# Altium PCB Node_Water.PcbDoc
Units mil, origin at the board's own origin, x right, y up, seen from the top; angles counter-clockwise.
Board outline 5635 x 3755 mil, 2 copper layers (Top Layer, Bottom Layer); 19 components, 13 nets, 136 pads, 0 vias.
Unrouted connection lines stored in the file: 1.
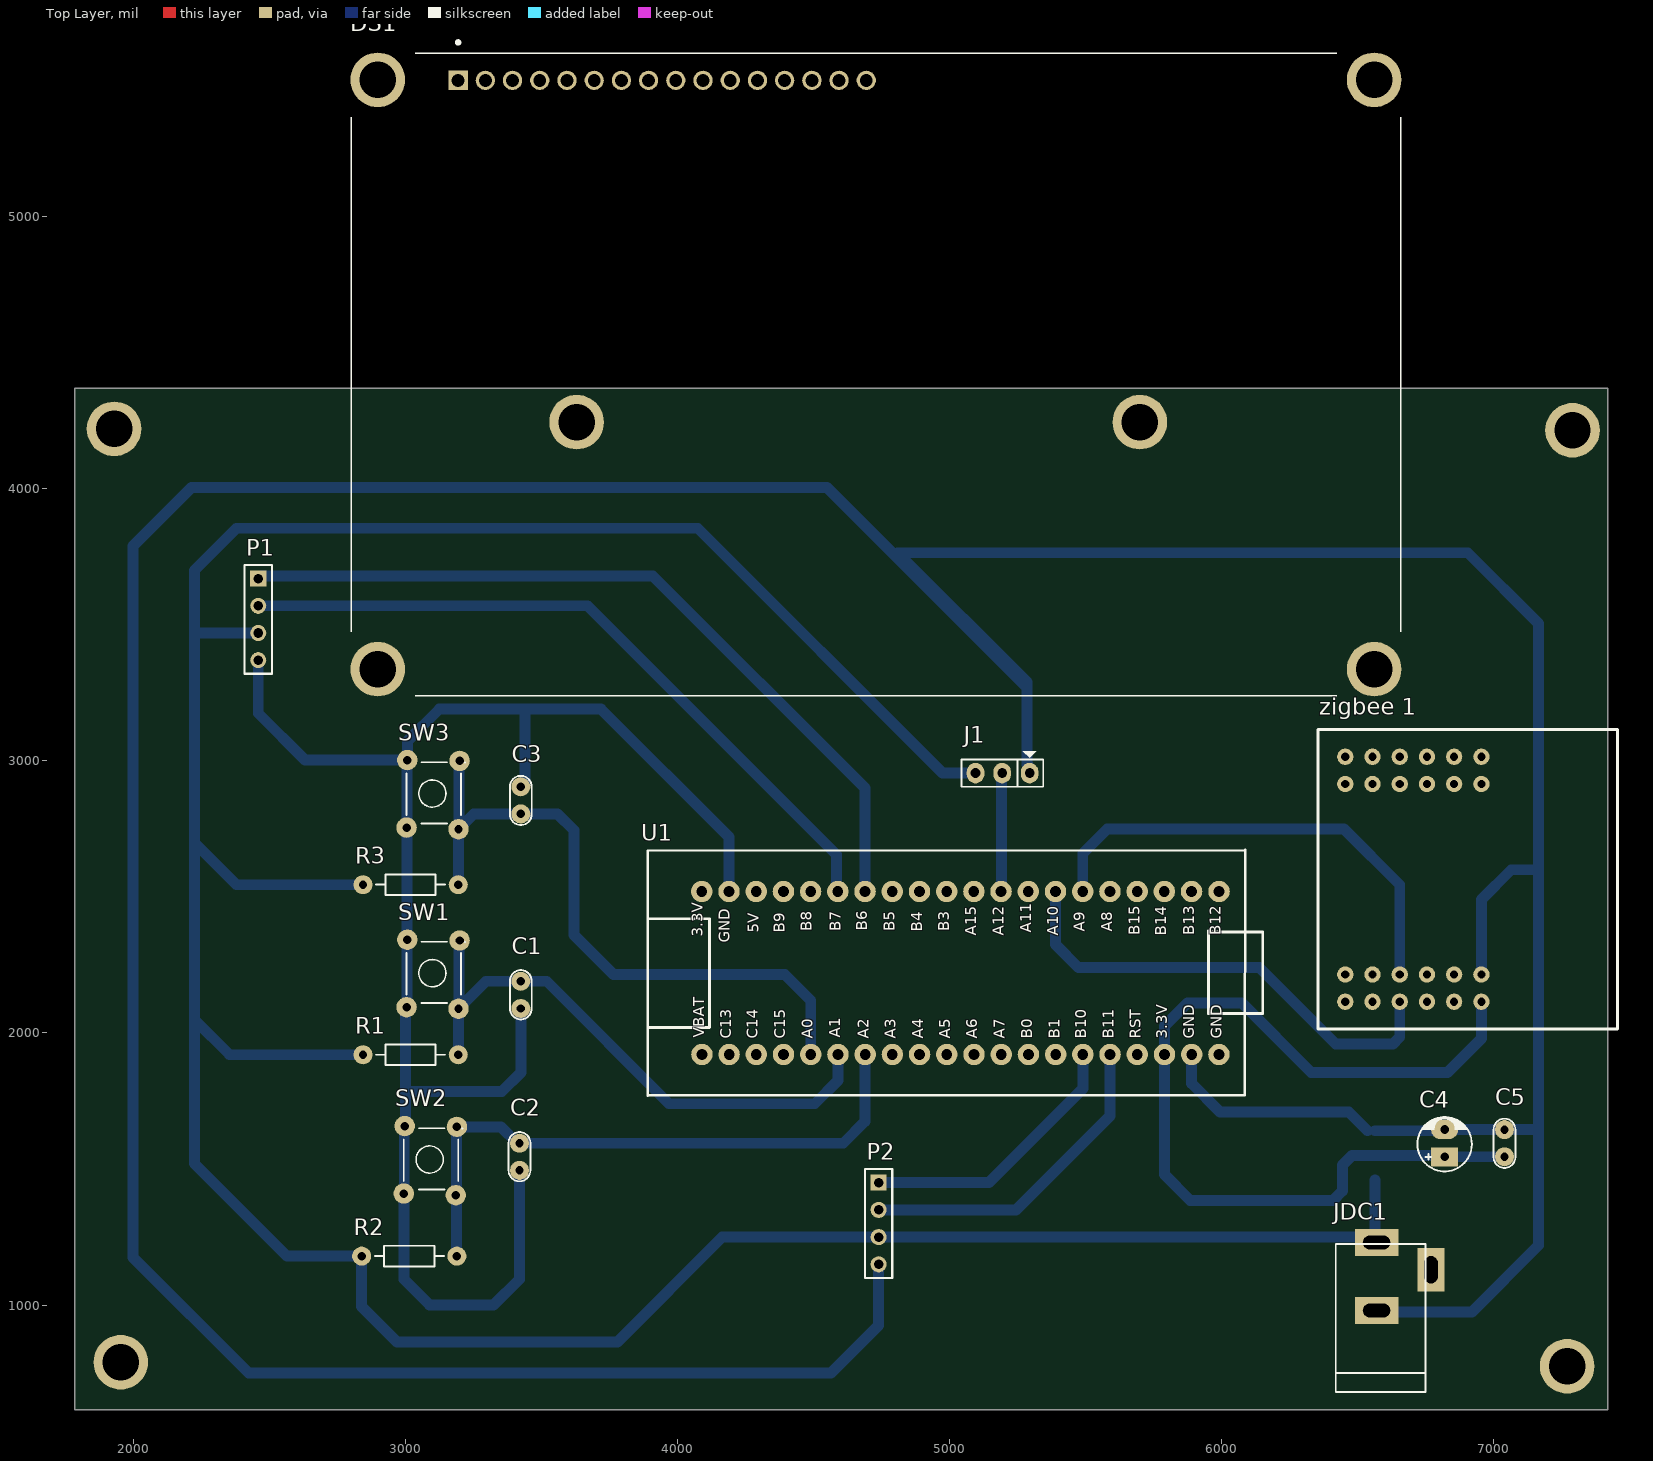
[diagram p0: Top Layer view]
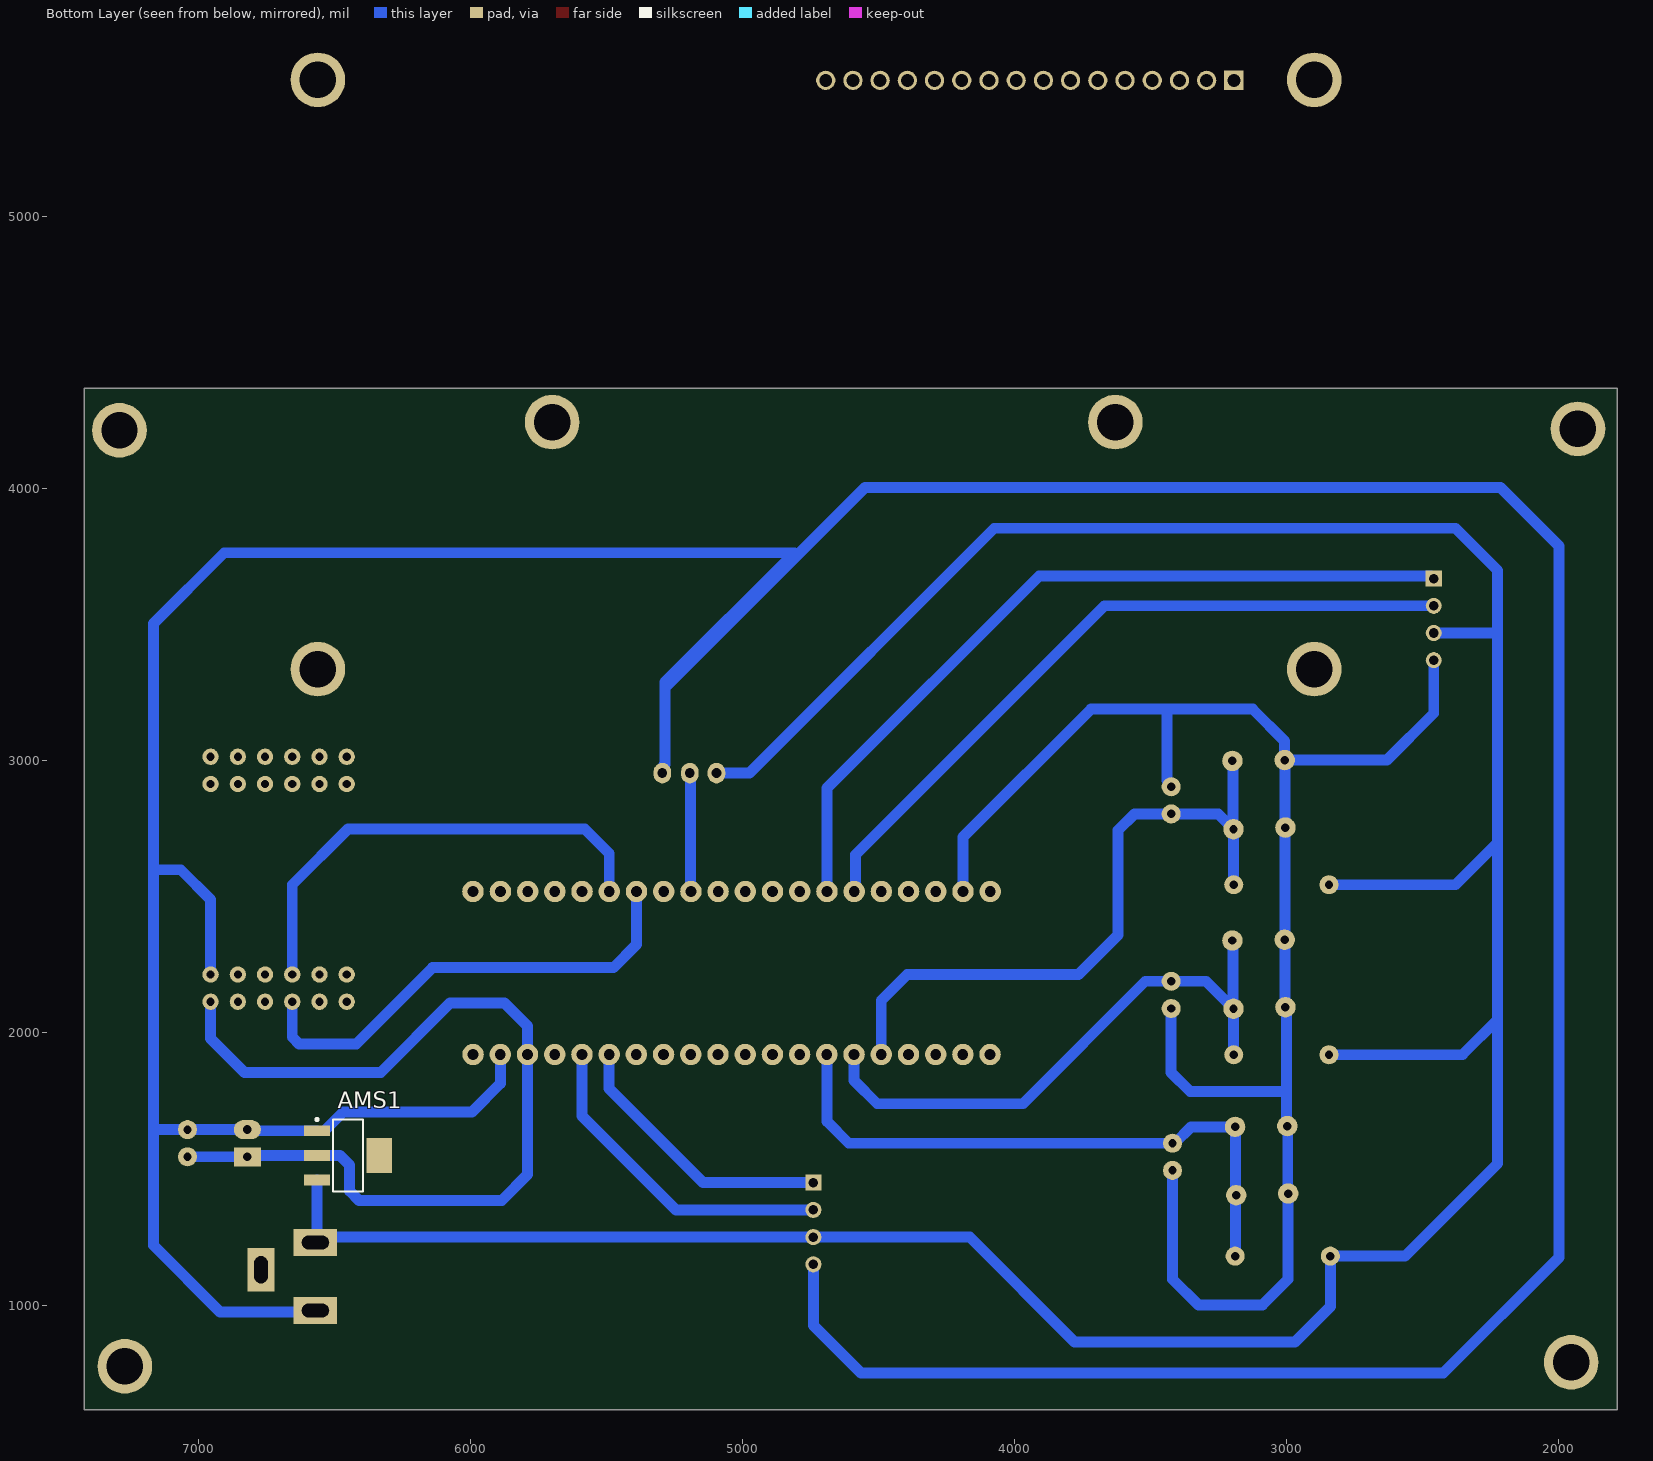
[diagram p1: Bottom Layer view, seen from below]
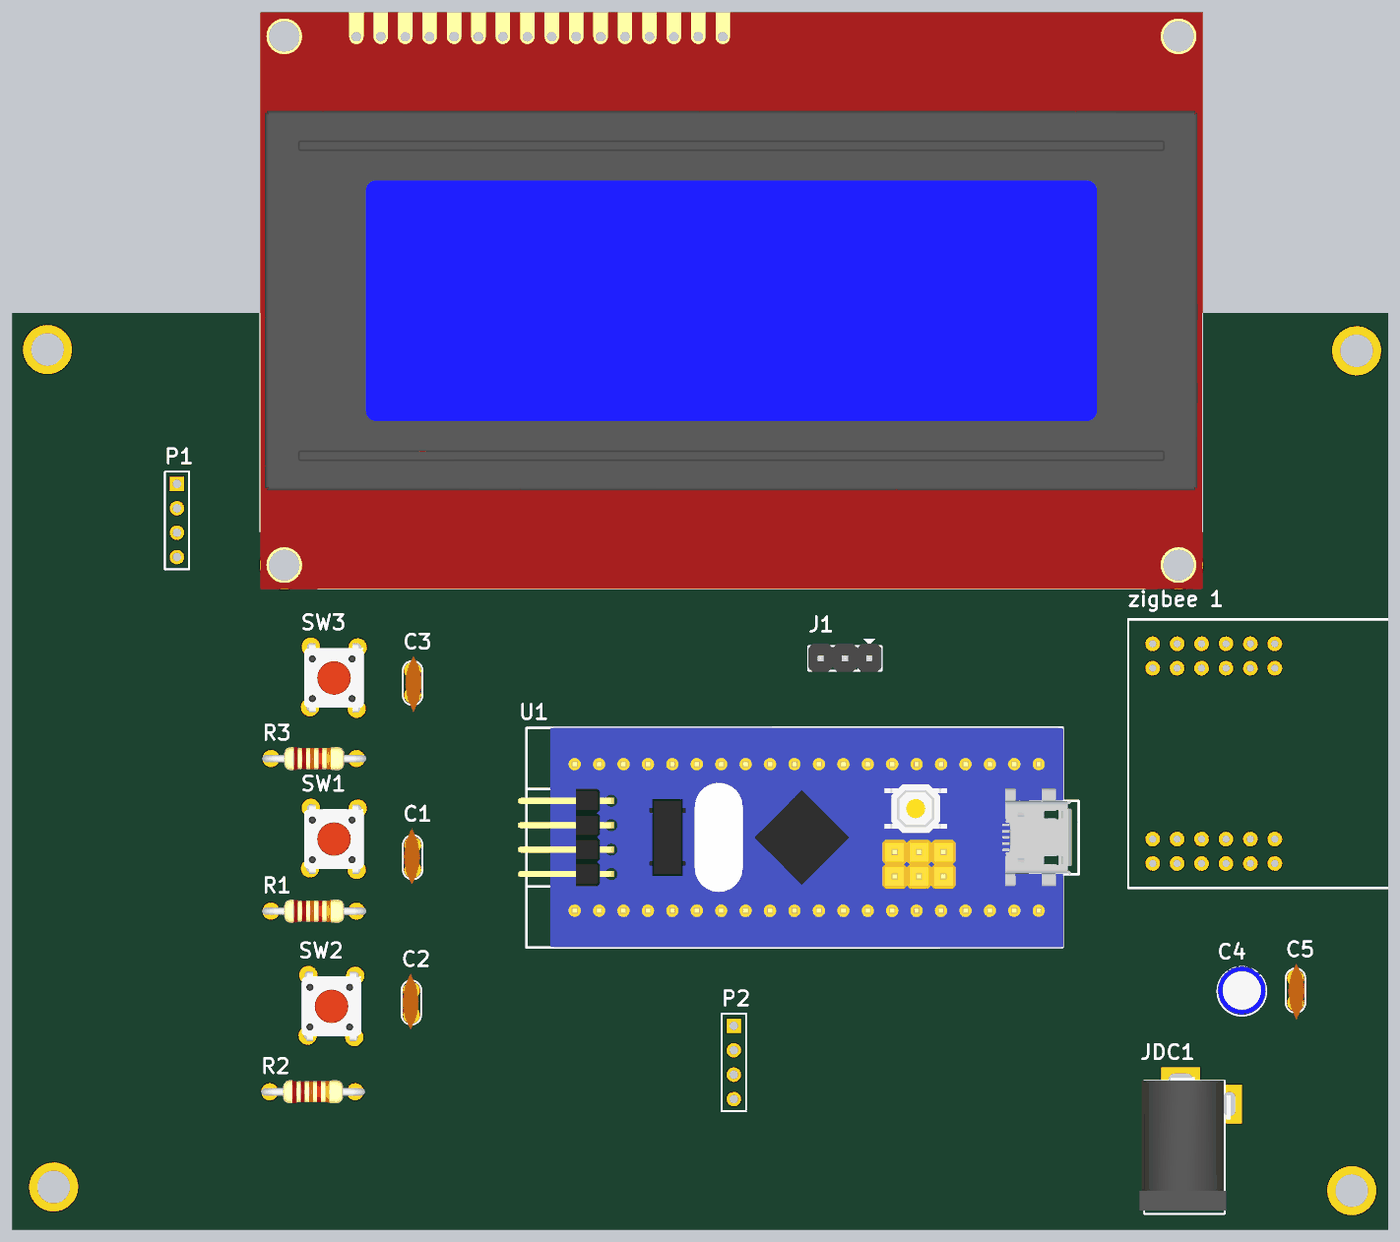
[diagram p2: 3D render of the assembled board from above, using the file's embedded part models]

## Layer stack, top to bottom
Top Solder: solder mask 0.4, Solder Resist, Dk 3.5
Top Layer: signal copper 1.4
Dielectric 1: dielectric 12.6, FR-4, Dk 4.8
Bottom Layer: signal copper 1.4
Bottom Solder: solder mask 0.4, Solder Resist, Dk 3.5

## Board outline
1785,615 7420,615 7420,4370 1785,4370

## Design rules (kind name [scope] priority, off if disabled: settings)
Clearance [All] p1: gap=20 ignorepadtopadclearanceinfootprint=FALSE
PolygonConnect [All] p1: connectstyle=Relief reliefconductorwidth=10 reliefentries=4 polygonreliefangle="90 Angle" airgapwidth=10
RoutingVias [All] p1: holewidth=28 width=50 viastyle="Through Hole" minholewidth=28 minwidth=50 maxholewidth=28 maxwidth=50
SolderMaskExpansion [All] p1: expansion=4 istentingtop=FALSE
Width [All] p1: maxlimit=100 minlimit=40 preferedwidth=80
30 further rules are at their usual default settings.

## Components (designator, comment, footprint, x,y, rotation, side; value= is the part's Value field where it differs from the comment)
AMS1 "LM1117" SOT223-4N 6450,1550 r180 bottom value=LM317
C1 "100nF" CN1 3425,2090 r90 top value=33pF
C2 "100nF" CN1 3420,1495 r90 top value=33pF
C3 "100nF" CN1 3425,2905 r270 top value=33pF
C4 "10uF" CP1/2 6820,1545 r90 top value=10uF/50V
C5 "100nF" CN1 7040,1645 r270 top value=33pF
DS1 "LCD-20X4B" LCD_LCD-20X4B 4730,4420 r0 top
J1 "Jumper 3" JP3 5195,2955 r180 top value=J3
JDC1 "Jac DC" DC-IN 6670,1105 r90 top
P1 "*Header" HDR1X4 2460,3670 r270 top
P2 "*Header" HDR1X4 4740,1450 r270 top
R1 "10k" R1/4W 3195,1920 r180 top value="R1/4W - 1K"
R2 "10k" R1/4W 3190,1180 r180 top value="R1/4W - 1K"
R3 "10k" R1/4W 3195,2545 r180 top value="R1/4W - 1K"
SW1 "SW" SW4 3005,2095 r90 top value="Button chip 4 pin"
SW2 "SW" SW4 2995,1410 r90 top value="Button chip 4 pin"
SW3 "SW" SW4 3005,2755 r90 top value="Button chip 4 pin"
U1 "STM32" STM32 5040.5,2220.5 r90 top
"zigbee 1" "zigbee_esp" zigbee 6955,2115 r180 top

## Footprints (in the part's own frame and the unit in brackets; to place one, negate y for a bottom-side part, rotate by r counter-clockwise, add the part's x,y. Pads: shape width x height; smd on the part's side, far side on the other; paste and mask are expansions set on the pad)
CN1 [mil]
  round 70 hole 31: 1(0,0) 2(100,0)
  silkscreen extent -40,-40 141,40, body extent -60,-30 170,37, height 265
CP1/2 [mil] "Tu hoa < 22uF/16>50V"
  rect 70x100 hole 32: 1(0,0)
  oval 70x100 hole 32: 2(100,0)
  silkscreen extent -53,-100 146,100, body extent -49,-99 149,99, height 287
DC-IN [mil] "Jac DC input"
  rect 100x160 hole 50 slot 100 at 90 deg: 1(125,100) 2(-125,100)
  rect 160x100 hole 50 slot 100 at 0 deg: 3(25,-100)
  silkscreen extent -425,-80 120,250, body extent -410,-105 134,269, height 434
HDR1X4 [mm] "Connector; Header; 4 Position"
  rect 1.5x1.5 hole 0.9: 1(0,0)
  round 1.5 hole 0.9: 2(2.54,0) 3(5.08,0) 4(7.62,0)
  silkscreen extent -1.27,-1.27 8.89,1.27, body extent -1.27,-1.27 8.89,1.27, height 7
JP3 [mil] "Jumper 3"
  oval 65x75 hole 36: 1(-100,0) 2(1,0) 3(99,0)
  silkscreen extent -150,-81 150,50, body extent -150,-60 150,55, height 355
LCD_LCD-20X4B [mm]
  rect 1.8x1.8 / inner round 1.8 / far side rect 1.8x1.8 hole 1.2: 1(-39,27.46)
  round 1.8 hole 1.2: 2(-36.46,27.46) 3(-33.92,27.46) 4(-31.38,27.46) 5(-28.84,27.46) 6(-26.3,27.46) 7(-23.76,27.46) 8(-21.22,27.46) 9(-18.68,27.46) 10(-16.14,27.46) 11(-13.6,27.46) 12(-11.06,27.46) 13(-8.52,27.46) 14(-5.98,27.46) 15(-3.44,27.46) 16(-0.9,27.46)
  round 5.1 hole 3.4: S1(-46.5,27.5) S2(46.5,27.5) S3(-46.5,-27.5) S4(46.5,-27.5)
  silkscreen extent -49,-30 49,31.15, body extent -49,-30 49,30, height 11.5
R1/4W [mil] "R 1/4W, 2 Pin, 350mil"
  round 70 hole 31: 1(0,0) 2(350,0)
  silkscreen extent 48,-38 302,38, body extent -40,-47 386,47, height 111
SOT223-4N [mm] "SOT223, 4-Leads, Body 6.5x3.5mm, Pitch 2.3mm, Lead Span 7mm, IPC Medium Density"
  rect 2.4x1 smd: 1(-2.9,2.3) 2(-2.9,0) 3(-2.9,-2.3)
  rect 2.4x3.3 smd: 4(2.9,0)
  silkscreen extent -3.03,-3.35 1.4,3.47, body extent -3.39,-3.27 3.5,3.23, height 1.72
STM32 [mm]
  round 2 hole 1: 1(7.607,-24.143) 2(7.607,-21.577) 3(7.607,-19.037) 4(7.607,-16.497) 5(7.607,-13.957) 6(7.607,-11.417) 7(7.607,-8.877) 8(7.607,-6.337) 9(7.607,-3.797) 10(7.607,-1.257) 11(7.607,1.283) 12(7.607,3.823) 13(7.607,6.363) 14(7.607,8.903) 15(7.607,11.443) 16(7.607,13.983) 17(7.607,16.523) 18(7.607,19.063) 19(7.607,21.603) 20(7.607,24.143) 21(-7.607,24.132) 22(-7.607,21.592) 23(-7.607,19.052) 24(-7.607,16.512) 25(-7.607,13.972) 26(-7.607,11.432) 27(-7.607,8.892) 28(-7.607,6.352) 29(-7.607,3.812) 30(-7.607,1.272) 31(-7.607,-1.268) 32(-7.607,-3.808) 33(-7.607,-6.348) 34(-7.607,-8.888) 35(-7.607,-11.428) 36(-7.607,-13.968) 37(-7.607,-16.508) 38(-7.607,-19.048) 39(-7.607,-21.588) 40(-7.607,-24.128)
  silkscreen extent -11.44,-28.23 11.47,29.2, body extent -11.4,-27.51 11.46,30.05, height 12.31
SW4 [mil] "SW button 4pin, 250 x250 mil"
  round 75 hole 31: 1(0,0) 2(245,-195) 3(248,-3) 4(-6,-191)
  silkscreen extent 15,-215 240,0, body extent -36,-220 276,24, height 276
zigbee [mil]
  round 60 hole 30: 1(500,0) 2(400,0) 3(300,0) 4(200,0) 5(100,0) 6(0,0) 7(0,-100) 8(100,-100) 9(200,-100) 10(300,-100) 11(400,-100) 12(500,-100) 13(500,-800) 14(400,-800) 15(300,-800) 16(200,-800) 17(100,-800) 18(0,-800) 19(0,-900) 20(100,-900) 21(200,-900) 22(300,-900) 23(400,-900) 24(500,-900)
  silkscreen extent -500,-1000 600,100

## Part data
AMS1: "Available in 1.8V, 2.5V, 2.85V, 3.3V, 5V, and  Adjustable Versions"
C1 C2 C3 C5: library part CN0, "Cremic For Xtal 1pF => 100pF"
C4: library part CP1, "Cap P  0,1uF < 22uF , 16 - 50V", Description 1="10 => 220uF/6,3V/10V - 10uF => 100uF/16V", Description 2="0,1uF => 33uF/50V - 10uF => 22uF/63V", Description 3="0,47uF => 10uF/100V"
DS1: "Display Development Tools 20X4 CHARACTER BLUE LCD W/BACKLIGHT", Package=None, Availability="In Stock", Check_prices=https://www.snapeda.com/parts/LCD-20X4B/Gravitech/view-part/?ref=eda, MF=Gravitech, MP=LCD-20X4B, Price=None, Purchase-URL=https://pricing.snapeda.com/search/part/LCD-20X4B/?ref=eda, SnapEDA_Link=https://www.snapeda.com/parts/LCD-20X4B/Gravitech/view-part/?ref=snap
J1: library part JP3
JDC1: library part DCIN, "Jac DC input"
P1 P2: library part "Header 4", "Header, 4-Pin, Right Angle", LatestRevisionDate=17-Jul-2002, LatestRevisionNote="Re-released for DXP Platform.", Publisher="Altium Limited"
R1 R2 R3: library part R1/4W, "Resistor 1/4W"
SW1 SW2 SW3: library part SW4, "Switch button 4 pin"

## Free pads (board coordinates)
  round 200.79 hole 133.86: 2(1930,4220) 3(1955,790) 4(7290,4215) 5(7270,775) 6(3630,4245) 7(5700,4245)

## Nets (pads, with @x,y where several pads share a name; then routed paths per layer and width w, separated by ;. In a path a pad name is that pad's centre, name@x,y a point inside that pad or via, vN(x,y) a via of type N, cw(c..) or ccw(c..) an arc to the next point about the centre after c; other vN are vias at no path point)
CHON: C1.2 R1.1 SW1.2 SW1.4 U1.26 | length 2181
  Bottom Layer w40: R1.1@3186.88,1920 R1.1 3195.5,1920.5 3195.5,2088.5 SW1.4 SW1.4@3198,2091 ; SW1.2 3198,2338 SW1.4@3198,2091 ; U1.26 4590.43,1825.43 4505,1740 3970,1740 3520,2190 C1.2 3297,2190 SW1.4@3198,2091
GND: "zigbee 1.7" AMS1.1 C1.1 C2.1 C3.1 C4.2 C5.1 J1.1 JDC1.2 P1.4 P2.4 SW1.1 SW1.3 SW2.1 SW2.3 SW3.1 SW3.3 U1.19 U1.39 | length 24222.8
  Bottom Layer w40: P1.4 2460,3175 2632,3003 SW3.3 3008,3073 3125,3190 3440,3190 ; SW3.3@3006.5,3001.5 3006.5,2756.5 SW3.1 3006.5,2753.5 3006.5,2344.5 SW1.3 3006.5,2341.5 3006.5,2096.5 SW1.1 3001.5,2091.5 3001.5,1785 ; C2.1 3420,1095 3325,1000 3090,1000 2995,1095 SW2.1 2996.5,1411.5 2996.5,1656.5 SW2.3 3001.5,1661.5 3001.5,1785 ; C1.1 3425,1855 3355,1785 3001.5,1785 ; C3.1 3425,2913.12 3440,2928.12 3440,3190 ; U1.19 4190,2720 3720,3190 3440,3190 ; P2.4 4740,925 4565,750 2425,750 2000,1175 2000,3790 2215,4005 4550,4005 4800,3755 5285,3270 ; J1.1 5290.22,2959.78 5290.22,2982.46 5285,2987.68 5285,3270 ; U1.39 5890.43,1814.57 5995,1710 6467.8,1710 AMS1.1@6536.93,1640.87 ; AMS1.1 6564.49,1640.87 6815.87,1640.87 C4.2 C5.1 7155,1645 7165,1655 ; JDC1.2@6577.11,975 6920,975 7165,1220 7165,1655 ; 6955,2215 6955,2490 7065,2600 7165,2600 ; 5285,3270 5285,3290 4810,3765 6905,3765 7165,3505 7165,2600 ; 7165,1655 7165,2600
LEN: C3.2 R3.1 SW3.2 SW3.4 U1.25 | length 2488
  Bottom Layer w40: R3.1@3186.88,2545 R3.1 3195.5,2545.5 3195.5,2748.5 SW3.4 SW3.4@3198,2751 ; SW3.2 3198,2998 SW3.4@3198,2751 ; U1.25 4490.43,2119.57 4395,2215 3765,2215 3620,2360 3620,2745 3560,2805 3252,2805 SW3.4@3198,2751
RX: "zigbee 1.10" U1.6 | length 1757.2
  Bottom Layer w40: U1.6 5490,2660 5580,2750 6450,2750 6655,2545 6655,2215
SCL: P1.1 U1.14 | length 2937.2
  Bottom Layer w40: P1.1 2469.53,3679.53 2492.49,3679.53 2492.96,3680 3910,3680 4690,2900 U1.14
SCL2: P2.1 U1.35 | length 1019.1
  Bottom Layer w40: P2.1 5145,1450 5490.43,1795.43 U1.35
SDA: P1.2 U1.15 | length 2641.1
  Bottom Layer w40: P1.2 3670,3570 4584.73,2655.27 4584.73,2525.27 U1.15
SDA2: P2.2 U1.36 | length 1219.1
  Bottom Layer w40: P2.2 5245,1350 5590.43,1695.43 U1.36
SIGNAL: J1.2 U1.9 | length 436.7
  Bottom Layer w40: U1.9 5192,2522 5192,2953 J1.2
TX: "zigbee 1.3" U1.7 | length 1751.5
  Bottom Layer w40: U1.7 5390,2325 5475,2240 6140,2240 6420,1960 6630,1960 6655,1985 6655,2115
VCC: AMS1.3 J1.3 JDC1.1 P1.3 P2.3 R1.2 R2.2 R3.2 | length 12181.2
  Bottom Layer w40: P1.3 2235,3470 2225,3480 ; R1.2 2355,1920 2225,2050 ; R3.2 2380,2545 2225,2700 ; J1.3 4975,2955 4075,3855 2380,3855 2225,3700 2225,3480 ; JDC1.1@6550,1250 P2.3 4165,1250 3780,865 2970,865 2840,995 R2.2 2565,1180 2225,1520 2225,2050 ; AMS1.3 6564.17,1235.83 JDC1.1 ; 2225,2050 2225,2700 ; 2225,2700 2225,3405 2225,3480
VCC3V3: "zigbee 1.6" AMS1.2 C4.1 C5.2 U1.38 | length 3452.7
  Bottom Layer w40: 6955,2115 6955,1980 6830,1855 6330,1855 6075,2110 5875,2110 5790.43,2025.43 U1.38 5790.43,1479.57 5885,1385 6410,1385 6445,1420 6445,1515 6480,1550 AMS1.2 6564.49,1549.69 6815.31,1549.69 C4.1 C5.2
XUONG: C2.2 R2.1 SW2.2 SW2.4 U1.27 | length 2282.5
  Bottom Layer w40: R2.1 3188,1182 3188,1402 SW2.4 3188,1406 3188,1653 SW2.2 3351.88,1655 3411.88,1595 C2.2 4610,1595 4690.43,1675.43 U1.27
pads on no net: "zigbee 1.1" "zigbee 1.2" "zigbee 1.4" "zigbee 1.5" "zigbee 1.8" "zigbee 1.9" "zigbee 1.11" "zigbee 1.12" "zigbee 1.13" "zigbee 1.14" "zigbee 1.15" "zigbee 1.16" "zigbee 1.17" "zigbee 1.18" "zigbee 1.19" "zigbee 1.20" "zigbee 1.21" "zigbee 1.22" "zigbee 1.23" "zigbee 1.24" AMS1.4 DS1.1 DS1.2 DS1.3 DS1.4 DS1.5 DS1.6 DS1.7 DS1.8 DS1.9 DS1.10 DS1.11 DS1.12 DS1.13 DS1.14 DS1.15 DS1.16 DS1.S1 DS1.S2 DS1.S3 DS1.S4 JDC1.3 U1.1 U1.2 U1.3 U1.4 U1.5 U1.8 U1.10 U1.11 U1.12 U1.13 U1.16 U1.17 U1.18 U1.20 U1.21 U1.22 U1.23 U1.24 U1.28 U1.29 U1.30 U1.31 U1.32 U1.33 U1.34 U1.37 U1.40

## Text inside footprints (layer, text, board x,y; h text height)
U1: Top Overlay "B12" at 6012.5,2359.4 h70 r90; Top Overlay "GND" at 6014.72,1979 h70 r90; Top Overlay "B13" at 5913.72,2359 h70 r90; Top Overlay "GND" at 5913.72,1979 h70 r90; Top Overlay "A1" at 4613.5,1981.8 h70 r90; Top Overlay "A0" at 4512.72,1979 h70 r90; Top Overlay "C14" at 4310.72,1979 h70 r90; Top Overlay "C13" at 4212.72,1979 h70 r90; Top Overlay "C15" at 4411.72,1979 h70 r90; Top Overlay "B6" at 4712.72,2375.2 h70 r90; Top Overlay "B4" at 4915.5,2372.7 h70 r90; Top Overlay "B7" at 4615.5,2374 h70 r90; Top Overlay "B14" at 5812.5,2358.2 h70 r90; Top Overlay "B5" at 4813.72,2374 h70 r90; Top Overlay "VBAT" at 4113.5,1981.86 h70 r90; Top Overlay "A10" at 5414.72,2356.9 h70 r90; Top Overlay "A12" at 5214.5,2356.9 h70 r90; Top Overlay "A15" at 5112.72,2356.9 h70 r90; Top Overlay "A9" at 5512.72,2372.7 h70 r90; Top Overlay "B3" at 5014.72,2374 h70 r90; Top Overlay "A11" at 5315.5,2368.2 h70 r90; Top Overlay "A8" at 5613.72,2371.5 h70 r90; Top Overlay "B15" at 5714.72,2359.4 h70 r90; Top Overlay "3.3V" at 5815.72,1979 h70 r90; Top Overlay "B1" at 5419.5,1979 h70 r90; Top Overlay "B0" at 5318.72,1979 h70 r90; Top Overlay "A7" at 5218.5,1979 h70 r90; Top Overlay "A6" at 5116.72,1979 h70 r90; Top Overlay "B11" at 5618.5,1979 h70 r90; Top Overlay "B10" at 5516.72,1979 h70 r90; Top Overlay "RST" at 5718.72,1979 h70 r90; Top Overlay "A4" at 4919.5,1979 h70 r90; Top Overlay "A3" at 4817.72,1979 h70 r90; Top Overlay "A2" at 4717.5,1979 h70 r90; Top Overlay "A5" at 5018.72,1979 h70 r90; Top Overlay "GND" at 4207.72,2331.8 h70 r90; Top Overlay "3.3V" at 4108.72,2354 h70 r90; Top Overlay "B8" at 4508.72,2374 h70 r90; Top Overlay "B9" at 4408.72,2369 h70 r90; Top Overlay "5V" at 4313.72,2369 h70 r90